# Allegro board ASR6601CB_PA_LNA_MD_V11_240312.brd
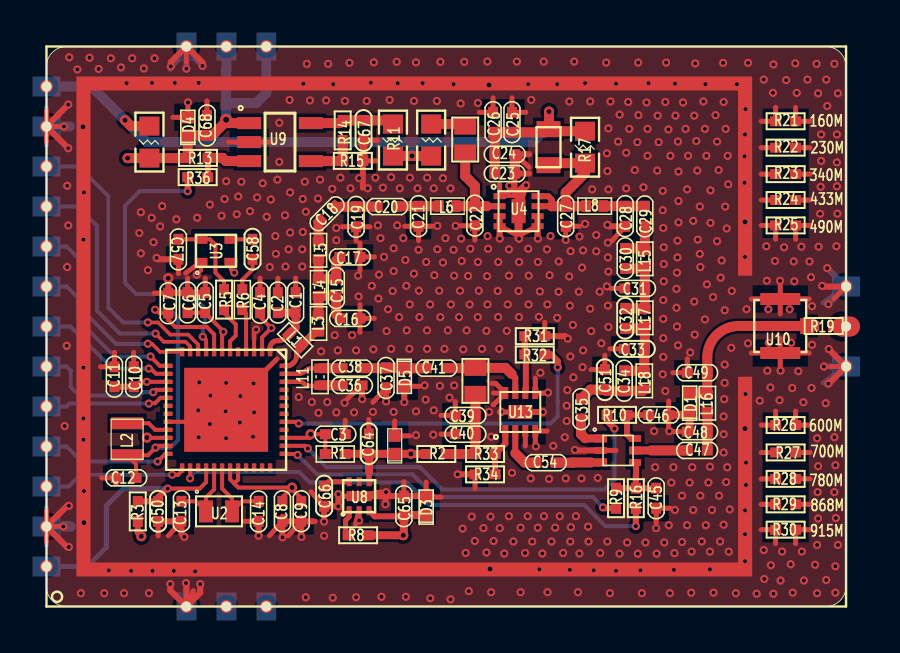
[diagram p0: board, top side]
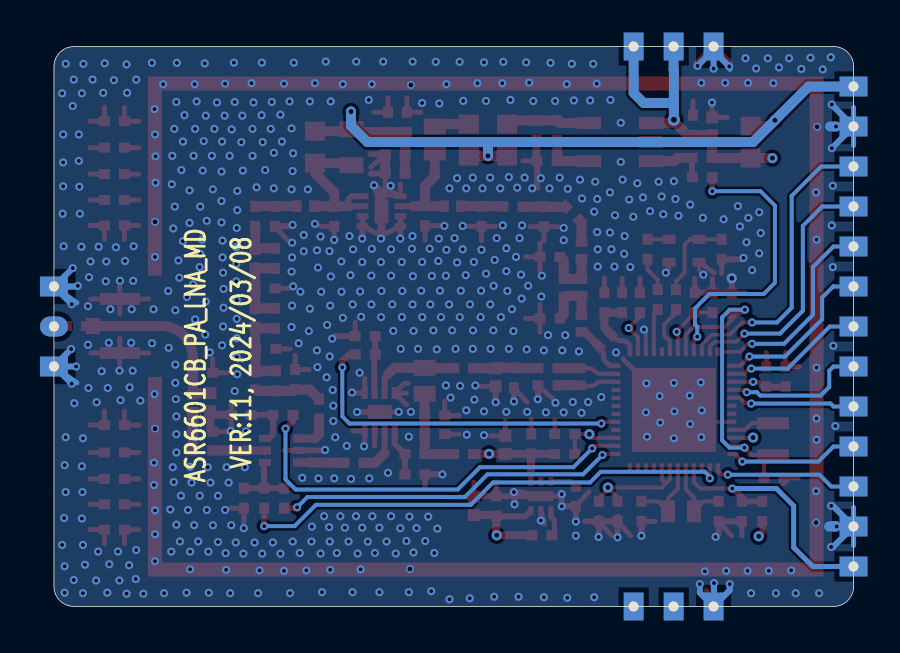
[diagram p1: board, bottom side, seen from below]

Outline 40.01 x 27.99 mm; copper layers: TOP, GND, VCC, BOTTOM. Coordinates in mm from the lower left corner of the outline.
Outline path: 0,26.99 0,1 arc(0.29,0.29) 1,0 39.01,0 arc(39.71,0.29) 40.01,1 40.01,26.99 arc(39.71,27.7) 39.01,27.99 1,27.99 arc(0.29,27.7) 0,26.99

## Placement (name value [footprint] x y rotation side)
C1  47nF  [C0402]  12.47 15.19 270 top
C2  82pF  [C0402]  11.58 15.19 270 top
C3  0.1uF  [C0402]  14.45 8.61 180 top
C4  0.1uF  [C0402]  10.69 15.19 90 top
C5  2.2uF  [C0402]  7.95 15.19 270 top
C6  0.1uF  [C0402]  7.06 15.19 270 top
C7  0.1uF  [C0402]  6.1 15.16 90 top
C8  2.2uF  [C0402]  11.81 4.75 270 top
C9  0.01uF  [C0402]  12.75 4.75 270 top
C10  0.1uF  [C0402]  4.37 11.48 270 top
C11  0.1uF  [C0402]  3.4 11.48 270 top
C12  0.47uF  [C0402]  3.99 6.43 180 top
C13  NC(10pF)  [C0402]  6.76 4.75 270 top
C14  NC(10pF)  [C0402]  10.62 4.75 90 top
C15  3.3pF  [C0402]  14.5 15.93 90 top
C16  6.0pF  [C0402]  15.19 14.4 180 top
C17  12pF  [C0402]  15.19 17.48 0 top
C18  100pF  [C0402]  14.05 19.63 45 top
C19  6.0pF  [C0402]  15.49 19.48 90 top
C20  1nF  [C0402]  17.04 19.99 180 top
C21  20pF  [C0402]  18.62 19.51 270 top
C22  NC  [C0402]  21.44 19.53 270 top
C23  1uF  [C0402]  22.94 21.64 0 top
C24  1nF  [C0402]  22.94 22.61 0 top
C25  0.1uF  [C0402]  23.29 24.21 270 top
C26  1nF  [C0402]  22.35 24.21 270 top
C27  2.4pF  [C0402]  25.98 19.51 270 top
C28  12pF  [C0402]  28.96 19.51 270 top
C29  330pF  [C0402]  29.94 19.51 90 top
C30  3.3pF  [C0402]  28.96 17.4 270 top
C31  12pF  [C0402]  29.44 15.9 180 top
C32  1pF  [C0402]  28.96 14.4 270 top
C33  12pF  [C0402]  29.41 12.88 180 top
C34  1pF  [C0402]  28.91 11.28 270 top
C35  1nF  [C0402]  26.75 9.87 90 top
C36  3.9pF  [C0402]  15.29 11.05 0 top
C37  1pF  [C0402]  16.99 11.43 90 top
C38  4.7pF  [C0402]  15.29 11.91 0 top
C39  0.1uF  [C0402]  20.95 9.55 180 top
C40  10nF  [C0402]  20.95 8.61 180 top
C41  10nF  [C0402]  19.51 11.91 180 top
C45  100pF  [C0402]  30.51 5.41 90 top
C46  100pF  [C0402]  30.63 9.58 0 top
C47  100pF  [C0402]  32.56 7.8 0 top
C48  NC  [C0402]  32.56 8.74 0 top
C49  NC  [C0402]  32.56 11.68 0 top
C50  10nF  [C0402]  5.59 4.75 270 top
C51  4.7pF  [C0402]  27.94 11.34 90 top
C54  1nF  [C0402]  24.99 7.19 0 top
C57  0.1uF  [C0402]  6.6 17.85 90 top
C58  10pF  [C0402]  10.31 17.85 270 top
C64  2.2uF  [C0402]  16.13 8.13 270 top
C65  2.2uF  [C0402]  17.88 5.02 90 top
C66  0.01uF  [C0402]  13.89 5.51 270 top
C67  2.2uF  [C0402]  15.87 23.8 90 top
C68  2.2uF  [C0402]  8.04 24.05 90 top
D1  RCLAMP0531T  [ESD1006_2N_MM]  32.18 10.21 90 top
D3  PTVS5V5D1BL  [ESD1006_2N_MM]  19 5.02 90 top
D4  PTVS5V5D1BL  [ESD1006_2N_MM]  7.08 24 90 top
D5  1PS79SB17  [ESD1006_2N_MM]  17.91 11.46 270 top
D6  PTVSUC3D3V3B  [ESD1006_2N_MM]  17.42 8.08 90 top
J3  HDR  [ASR6601MDPA_2800X3600_22N_MM]  13 14 90 top
L1  56nH  [L0402]  12.45 13.31 135 top
L2  15uH  [L2016]  4.04 8.36 270 top
L3  1.8nH  [L0402]  13.61 14.15 90 top
L4  7.5nH  [L0402]  13.61 15.95 90 top
L5  18nH  [L0402]  13.61 17.81 90 top
L6  4.7nH  [L0402]  20.07 20.02 0 top
L7  100nH/0805  [L2012]  25.12 22.96 90 top
L8  5.6nH  [L0402]  27.43 20.02 0 top
L11  33nH  [L0402]  13.69 11.48 90 top
L12  390nH/0603  [L0603]  21.46 11.28 90 top
L14  100nH/0603  [L0603]  20.95 23.34 90 top
L15  8.2nH  [L0402]  29.94 17.38 270 top
L16  0R  [L0402]  33.07 10.16 270 top
L17  6.2nH  [L0402]  29.94 14.43 270 top
L18  18nH  [L0402]  29.91 11.28 270 top
NOREF  -  []  -68.73 -66.24 0 top
NOREF#2  -  []  -65.56 -63.06 0 top
NOREF#3  -  []  -65.56 -63.06 0 top
NOREF#4  -  []  -68.73 -66.24 0 top
NOREF#5  -  []  -230.68 -277.82 0 top
R1  0R  [R0402]  14.45 7.62 180 top
R2  0R  [R0402]  19.51 7.62 0 top
R3  1K  [R0402]  4.57 4.75 270 top
R5  0R  [R0402]  8.89 15.34 270 top
R6  10R  [R0402]  9.8 15.34 270 top
R7  240R/0603  [R0603]  19.25 23.32 270 top
R8  10k  [R0402]  15.6 3.56 180 top
R9  100R  [R0402]  28.5 5.41 90 top
R10  100R  [R0402]  28.55 9.58 180 top
R11  0R  [R0603]  17.34 23.32 90 top
R13  NC(10K)  [R0402]  7.59 22.43 0 top
R14  NC(100K)  [R0402]  14.82 23.8 90 top
R15  NC(47K)  [R0402]  15.33 22.28 180 top
R16  NC(100R)  [R0402]  29.49 5.41 90 top
R17  300R/0603  [R0603]  26.95 22.96 90 top
R19  0R  [R0402]  38.89 14.02 0 top
R21  NC(0R)  [R0402]  36.98 24.26 0 top
R22  NC(0R)  [R0402]  36.98 22.94 0 top
R23  NC(0R)  [R0402]  36.98 21.62 0 top
R24  NC(0R)  [R0402]  36.98 20.32 0 top
R25  NC(0R)  [R0402]  36.98 19.05 0 top
R26  NC(0R)  [R0402]  36.98 9.07 0 top
R27  NC(0R)  [R0402]  36.98 7.7 0 top
R28  NC(0R)  [R0402]  36.98 6.38 0 top
R29  NC(0R)  [R0402]  36.98 5.11 0 top
R30  NC(0R)  [R0402]  36.98 3.84 0 top
R31  100R  [R0402]  24.43 13.51 180 top
R32  100R  [R0402]  24.43 12.6 180 top
R33  NC(5.1K)  [R0402]  21.95 7.62 0 top
R34  0R  [R0402]  21.95 6.6 0 top
R35  NC(0R)  [R0603]  5.16 23.22 90 top
R36  1K  [R0402]  7.57 21.46 0 top
U1  ASR6601QFN48  [ASR6501_QFN40P_600X600_48N_MM]  8.99 9.83 90 top
U2  XO_32.768K  [XTAL_SMD160X100_2N_MM]  8.64 4.75 0 top
U3  TCXO  [OSC_SMD200X160_4N_MM]  8.48 17.78 0 top
U4  ZD1118  [DFN50P_200X200_8N_MM]  23.62 19.76 0 top
U7  PE4259/ZD5402  [SC50P_150X150_6N_MM]  28.6 7.8 90 top
U8  SGM2035C-3.3  [LDO_DFN50P_160X160_6N_MM]  15.65 5.51 90 top
U9  XC6227C381MR-G(SGM2035C-3.3)  [SOT95P_165X290_5N_MM]  11.7 23.22 0 top
U10  -  [IPEX]  36.71 14.02 0 top
U13  ZD9037  [DFN50P_200X200_8N_MM]  23.71 9.72 90 top

## Library data of the parts
C1-C41 C45-C49 C51 C54 C57 C58 C64-C68 = RCL_CAP_NP
C50 = CAP
D1 D3-D6 = TVS-BI
J3 = CN_2
L1-L6 L8 L11 L15-L18 = RCL_IND
L7 L12 L14 = INDUCTOR/SM
R1 R2 R5-R11 R13-R17 R21-R36 = RCL_RES
R3 R19 = RES
U1 = ASR6505_9
U2 = XO
U3 = TCXO_0
U4 = ZD1037_1
U7 = MXD8625C_1
U8 = IC-LDO-SGM2035C_0
U9 = IC-LDO-SGM2035C_3
U10 = IPEX
U13 = ZD1037_0

## Footprints (pads in the part's own frame, mm; a bottom-side part is the same pattern mirrored in y, then rotated)
ASR6501_QFN40P_600X600_48N_MM
  rect 0.45x0.22 smd: 1(2.9,-2.2) 2(2.9,-1.8) 3(2.9,-1.4) 4(2.9,-1) 5(2.9,-0.6) 6(2.9,-0.2) 7(2.9,0.2) 8(2.9,0.6) 9(2.9,1) 10(2.9,1.4) 11(2.9,1.8) 12(2.9,2.2) 25(-2.9,2.2) 26(-2.9,1.8) 27(-2.9,1.4) 28(-2.9,1) 29(-2.9,0.6) 30(-2.9,0.2) 31(-2.9,-0.2) 32(-2.9,-0.6) 33(-2.9,-1) 34(-2.9,-1.4) 35(-2.9,-1.8) 36(-2.9,-2.2)
  rect 0.22x0.45 smd: 13(2.2,2.9) 14(1.8,2.9) 15(1.4,2.9) 16(1,2.9) 17(0.6,2.9) 18(0.2,2.9) 19(-0.2,2.9) 20(-0.6,2.9) 21(-1,2.9) 22(-1.4,2.9) 23(-1.8,2.9) 24(-2.2,2.9) 37(-2.2,-2.9) 38(-1.8,-2.9) 39(-1.4,-2.9) 40(-1,-2.9) 41(-0.6,-2.9) 42(-0.2,-2.9) 43(0.2,-2.9) 44(0.6,-2.9) 45(1,-2.9) 46(1.4,-2.9) 47(1.8,-2.9) 48(2.2,-2.9)
  rect 4.2x4.2 smd: 49(0,0)
ASR6601MDPA_2800X3600_22N_MM
  round 0.65 hole 0.5: 1(-12,13) 2(-10,13) 3(-8,13) 4(-6,13) 5(-4,13) 6(-2,13) 7(0,13) 8(2,13) 9(4,13) 10(6,13) 11(8,13) 12(10,13) 13(12,13) 14(14,6) 15(14,4) 16(14,2) 17(2,-27) 19(-2,-27) 20(-14,2) 21(-14,4) 22(-14,6)
  oval 1x1.4 hole 0.5: 18(0,-27)
C0402
  rect 0.55x0.5 smd: 1(-0.5,0) 2(0.5,0)
DFN50P_200X200_8N_MM
  rect 0.6x0.3 smd: 1(-0.95,0.75) 2(-0.95,0.25) 3(-0.95,-0.25) 4(-0.95,-0.75) 5(0.95,-0.75) 6(0.95,-0.25) 7(0.95,0.25) 8(0.95,0.75)
  rect 0.7x1.2 smd: 9(0,0)
ESD1006_2N_MM
  rect 0.6x0.6 smd: 1(-0.45,0) 2(0.45,0)
IPEX
  rect 2x0.6 smd: 1(0,1.35) 2(0,-1.35)
  rect 0.7x0.8 smd: 3(1.35,0)
L0402
  rect 0.47x0.58 smd: 1(-0.425,0) 2(0.425,0)
L0603
  rect 0.8x1.1 smd: 1(-0.65,0) 2(0.65,0)
L2012
  rect 0.8x1.2 smd: 1(-0.9,0) 2(0.9,0)
L2016
  rect 0.6x1.6 smd: 1(-0.8,0) 2(0.8,0)
LDO_DFN50P_160X160_6N_MM
  rect 0.45x0.25 smd: 1(-0.725,0.5) 2(-0.725,0) 3(-0.725,-0.5) 4(0.725,-0.5) 5(0.725,0) 6(0.725,0.5)
  rect 0.5x1.25 smd: 7(0,0)
OSC_SMD200X160_4N_MM
  rect 0.65x0.45 smd: 1(-0.75,-0.575) 2(0.75,-0.575) 3(0.75,0.575) 4(-0.75,0.575)
R0402
  rect 0.55x0.5 smd: 1(-0.5,0) 2(0.5,0)
R0603
  rect 0.95x1 smd: 1(-0.8,0) 2(0.8,0)
SC50P_150X150_6N_MM
  rect 0.4x0.6 smd: 1(0.6,0.85) 3(-0.6,0.85) 5(0,-0.85)
  rect 0.35x0.6 smd: 2(0,0.85) 4(-0.6,-0.85) 6(0.6,-0.85)
SOT95P_165X290_5N_MM
  rect 1.2x0.6 smd: 1(-1.554,0.95) 2(-1.554,0) 3(-1.554,-0.95) 4(1.529,-0.95) 5(1.529,0.95)
XTAL_SMD160X100_2N_MM
  rect 0.7x1.1 smd: 1(-0.65,0) 2(0.65,0)

## Nets
GND: C1.1 C2.1 C3.1 C4.2 C5.1 C6.1 C7.2 C8.2 C9.2 C10.1 C11.1 C12.2 C13.2 C14.1 C16.1 C17.2 C19.1 C21.2 C22.2 C23.2 C24.2 C25.1 C26.1 C27.2 C28.2 C31.2 C33.2 C36.2 C37.1 C39.2 C40.2 C45.1 C46.2 C48.1 C49.1 C50.2 C51.2 C57.1 C64.1 C65.2 C66.2 C67.1 C68.2 D1.1 D3.2 D4.2 D5.2 D6.2 J3.2 J3.12 J3.14 J3.17 J3.19 J3.22 R15.1 R21.1 R21.2 R22.1 R22.2 R23.1 R23.2 R24.1 R24.2 R25.1 R25.2 R26.1 R26.2 R27.1 R27.2 R28.1 R28.2 R29.1 R29.2 R30.1 R30.2 R31.1 R34.1 U1.3(GND_PLL) U1.20(GND_DCC) U1.49(GND) U3.1(GND#1) U3.2(GND#2) U4.1(NC1) U4.3(NC2) U4.4(NC3) U4.5(NC4) U4.6(NC5) U4.9(EPAD) U7.2(GND) U8.2(GND) U8.7(EGND) U9.2(GND) U10.1 U10.2 U13.3(NC2) U13.4(NC3) U13.5(NC4) U13.8(NC6) U13.9(EPAD)
VBAT_IN: C65.1 C68.1 D3.1 D4.1 J3.15 J3.16 R8.1 R13.1 R35.1 U8.3(IN) U9.1(IN)
VCC_3V3: C3.2 C4.1 C5.2 C6.2 C8.1 C9.1 C10.2 C11.2 R1.2 R3.2 U1.2(VDD_IN) U1.7(VBAT_RF) U1.15(VBAT_ESD0) U1.22(VBAT_DCC) U1.31(VBAT_RTC) U1.32(VBAT_ANA) U1.39(VBAT_ESD3)
VDD_LNA: C39.1 C40.1 L12.1 R2.2 R33.1
VDD_PA: C23.1 C24.1 C25.2 C26.2 J3.13 L7.2 R7.2 R11.1 R17.2 R35.2
VDD_PA_ADJ: C67.2 R11.2 R14.2 U9.5(OUT)
ANT_SW_L1: R16.1 U1.26(GPIO59/LORAC_RF_SW)
GPIO00_L1: J3.11 U1.10(GPIO00/SPI_CLK)
GPIO01_L1: R36.1 U1.9(GPIO01/SPI_SEL)
GPIO02_L1: J3.9 U1.12(GPIO02/SPI_MISO)
GPIO03_L1: J3.10 U1.11(GPIO03/SPI_MOSI)
GPIO04_L1: U1.36(GPIO04/UART1_TX)
GPIO05_L1: U1.35(GPIO05/UART1_RX)
GPIO06_L1: J3.8 U1.13(GPIO06/SWD_DAT)
GPIO07_L1: J3.7 U1.14(GPIO07/SWD_CLK)
GPIO08_L1: U1.34(GPIO08/ADC_IN1)
GPIO09_L1: R9.1 U1.37(GPIO09/DAC_OUT)
GPIO10_L1: U1.42(GPIO10/OPA0_OUT)
GPIO11_L1: U1.33(GPIO11/ADC_IN0)
GPIO14_L1: U1.18(GPIO14/I2C_CLK)
GPIO15_L1: U1.19(GPIO15/I2C_DAT)
GPIO16_L1: J3.6 U1.16(GPIO16/UART0_RX)
GPIO17_L1: J3.5 U1.17(GPIO17/UART0_TX)
GPIO32_L1: U1.45(GPIO32/COMP1_OUT)
GPIO33_L1: U1.44(GPIO33/COMP1_INN)
GPIO37_L1: U1.43(GPIO37/COMP1_INP)
GPIO44_L1: R32.1 U1.41(GPIO44/OPA0_INN)
GPIO45_L1: U1.40(GPIO45/OPA0_INP)
GPIO47_L1: R10.2 U1.38(GPIO47/LPUART_TX)
GPIO58_L1: U1.27(GPIO58/LP_TIMER)
GPIO60_L1: J3.3 U1.25(GPIO60/LPUART_RX)
GPIO62_L1: J3.4 U1.24(GPIO62/WKUP)
LDO_3V3: C64.2 D6.1 J3.20 J3.21 R1.1 R2.1 U8.4(OUT)
PWR_TCXO_L1: R5.2 U1.6(PWR_TCXO)
RF_TR: C49.2 D1.2 L16.1 R19.1 U10.3
RFI_N_L1: C38.1 L11.2 U1.47(RFI_N)
RFI_P_L1: C36.1 L11.1 U1.46(RFI_P)
RFO_L1: L1.1 L3.1 U1.48(RFO)
RSTN_L1: C50.1 J3.1 R3.1 U1.28(RSTN)
VR_PA_L1: C1.2 C2.2 L1.2 U1.1(VR_PA)
VREG_L1: C7.1 C12.1 L2.2 U1.8(VDCC_RF) U1.23(VREG)
XO32K_IN_L1: C13.1 U1.29(XO32K_IN) U2.1(XTA)
XO32K_OUT_L1: C14.2 U1.30(XO32K_OUT) U2.2(XTB)
XTA_L1: R6.2 U1.4(XTA)
XTB_L1: U1.5(XTB)
N16777695: L2.1 U1.21(DCC_SW)
N16783930: C37.2 C38.2 C41.2 D5.1
N16784957: C41.1 L12.2 U13.7(RFOUT)
N16787701: C57.2 R5.1 U3.4(VCC)
N17165846: R13.2 R36.2 U9.3(EN)
N17167587: R14.1 R15.2 U9.4(FB)
N17184405: L14.2 R7.1
N17184423: C27.1 L7.1 L8.1 R17.1 U4.7(RFOUT) U4.8(NC6)
N17184595: C22.1 L6.2 L14.1 U4.2(RFIN)
N17196037: C45.2 R9.2 R16.2 U7.4(VC2)
N17196046: C46.1 R10.1 U7.6(VC1)
N17196048: C47.1 U7.5(RFC)
N17196103: C47.2 C48.2 L16.2
N17196171: C54.1 U13.2(RFIN)
N17198849: C30.2 C31.1 C32.1 L15.2 L17.1
N17206614: C35.1 U7.1(RF1)
N17221635: C66.1 U8.6(BP)
N17221684: R8.2 U8.1(EN)
N17240361: C28.1 C29.2 L8.2
N17246084: C32.2 C33.1 C34.1 L17.2 L18.1
N17247102: C54.2 U7.3(RF2)
N17255377: C34.2 C35.2 C51.1 L18.2
N17256212: C29.1 C30.1 L15.1
N17258664: C18.2 C19.2 C20.2
N17258678: C15.1 C16.2 L3.2 L4.1
N17258699: C15.2 C17.1 L4.2 L5.1
N17258757: C18.1 L5.2
N17259603: C20.1 C21.1 L6.1
N17299920: R33.2 R34.2 U13.1(NC1)
N17300837: R31.2 R32.2 U13.6(SHDN)
N17308759: C58.2 R6.1
N17309286: C58.1 U3.3(VOUT)
N17313163: J3.18 R19.2

Pads without a net: U8 5

## Via types
v1: diameter 0.406, hole 0.203, TOP to BOTTOM, 647 vias
v2: diameter 0.508, hole 0.254, TOP to BOTTOM, 11 vias
v3: diameter 0.61, hole 0.305, TOP to BOTTOM, 1 via
v4: diameter 0.4, hole 0.25, TOP to BOTTOM, 6 vias

## Routing (per net, layer and track width the routed paths; a pad name or vN(x,y) marks a point on that pad's centre or on a via; arc(x,y) is an arc through that point)
GND: length 224.8
  TOP w0.2: v1(10.49,13.84) 10.39,13.74 U1.3 ; U3.1 7.73,16.8 v1(7.52,16.59) ; U1.20 8.39,9.23 U1.49 ; 23.62,20.66 23.51,20.66 23.37,20.52 23.01,20.52 22.99,20.51 U4.1 22.67,20.77 ; v1(9.4,16.69) 9.23,16.85 U3.2
  TOP w0.25: 15.07,10.39 C36.2 ; R31.1 24.93,14.21 ; C1.1 12.47,16.41 ; 37.48,18.36 R25.2 38.2,19.05 ; R24.2 38.2,20.32 ; C16.1 15.69,15.1 ; C16.1 15.69,13.71 ; C16.1 16.41,14.4 ; 25.98,18.29 C27.2 26.67,19.01 ; 23.29,25.43 C25.1 23.99,24.71 ; 23.44,20.95 C23.2 ; U7.2 28.5,7.8 ; C65.2 17.88,6.24 ; 35.76,24.26 R21.1 36.48,24.95 ; 35.76,22.94 R22.1 ; 38.2,24.26 R21.2 37.48,24.95 ; J3.2 0,4.77 ; J3.2 0,3.23 ; J3.2 0.77,4 ; 28.3,18.29 C28.2 ; 24.46,8.02 U13.4 25.05,8.77 ; U4.9 23.93,20.81 ; 28.19,12.88 C33.2 ; 12.1,3.53 C9.2 ; 5.4,15.66 C7.2 ; 23.62,20.63 23.62,20.81 ; R15.1 16.55,22.28 ; 13.45,4.25 13.32,4.25 ; C5.1 7.95,16.41 ; U10.2 36.71,13.42 ; U10.2 36.71,11.93 ; U10.2 35.27,12.67 ; U10.2 38.16,12.67 ; J3.22 7.35,0.78 ; 35.76,6.38 R28.1 ; 23.83,18.64 U4.5 ; 11.16,3.53 C8.2 ; R27.2 38.2,7.7 ; 22.66,9.72 U13.9 ; 2.77,6.43 C12.2 ; 24.46,11.41 U13.5 25.05,10.67 ; 19.74,5.47 D3.2 19,6.21 ; 32.06,12.38 C49.1 31.34,11.68 ; 15.69,16.78 C17.2 ; C17.2 15.69,18.17 ; C17.2 16.41,17.48 ; 9.92,4.25 C14.1 ; 7,27.23 J3.14 ; C19.1 16.19,18.98 ; C19.1 15.49,18.26 ; C19.1 14.8,18.98 ; U10.1 36.71,16.12 ; U10.1 35.27,15.37 ; U10.1 38.16,15.37 ; U10.1 36.71,14.63 ; 22.3,11.15 22.48,11.15 U13.8 ; 31.13,8.88 C46.2 31.13,10.27 ; 17.42,9.27 D6.2 18.17,8.53 ; 35.76,21.62 R23.1 ; C6.1 7.06,16.41 ; 22.67,21.11 22.67,20.77 ; 19.74,9.55 C39.2 20.45,10.25 ; 38.2,3.84 R30.2 37.48,3.14 ; 17.92,19.01 C21.2 ; C21.2 19.31,19.01 ; C21.2 18.62,18.29 ; 21.44,18.31 C22.2 20.74,19.03 ; 2.71,11.98 C11.1 3.4,12.7 ; U1.49 11.54,12.37 ; v1(16.99,10.25) 16.99,10.21 ; 9.1,23.22 U9.2 11.19,23.22 ; 37.48,9.76 R26.2 38.2,9.07 ; C10.1 4.37,12.7 ; 36.48,9.76 R26.1 35.76,9.07 ; 15.46,4.12 U8.2 v1(15.65,4.29) ; J3.12 0,24.77 ; J3.12 0.77,24 ; J3.12 0,23.23 ; 35.76,7.7 R27.1 ; R29.2 38.2,5.11 ; R23.2 38.2,21.62 ; 21.65,24.71 C26.1 22.35,25.43 ; 23.96,8.02 U13.3 ; C64.1 16.13,9.35 ; 27.94,12.56 C51.2 27.25,11.84 ; 35.76,3.84 R30.1 36.48,3.14 ; 6.96,16.67 U3.1 ; 31.34,8.74 C48.1 ; v1(14.6,5.61) 14.71,5.51 U8.7 16.72,5.73 ; 5.59,3.53 C50.2 ; 16.34,10.21 C37.1 ; C68.2 8.04,25.27 ; U13.8 22.37,10.08 22.35,10.08 ; U13.8 22.36,10.67 ; D5.2 18.65,11.01 ; 36.48,18.36 R25.1 35.76,19.05 ; 35.76,5.11 R29.1 ; U4.4 23.42,18.64 ; 21.45,5.91 R34.1 ; 30.51,4.19 C45.1 31.2,4.91 ; C67.1 16.56,23.3 ; C2.1 11.58,16.41 ; C24.2 24.16,21.95 ; 6.6,16.63 C57.1 ; 6.1,3.53 C13.2 ; 7.08,25.2 D4.2 6.33,24.45 ; 35.76,20.32 R24.1 ; 28.22,15.9 C31.2 ; C4.2 10.69,16.41 ; 39.4,15.39 J3.17 ; R22.2 38.2,22.94 ; U4.1 23.42,20.88 ; C3.1 14.95,9.31 ; R28.2 38.2,6.38 ; 13.24,5.73 C66.2 ; 39.24,12 J3.19 ; 19.74,8.61 C40.2
  TOP w0.3: J3.22 6.2,0.8 v1(6.2,1.11) ; J3.22 7.48,0.48 7.7,0.69 v1(7.7,1.11) ; J3.22 7,1.15 v1(6.99,1.17) ; 13.32,4.25 C9.2 ; C9.2 C8.2 ; C9.2 12.75,3.48 v1(12.76,3.47) ; C9.2 12.75,4.43 ; v1(24.84,9.72) U13.9 ; v1(24.59,18.39) 24.57,18.4 U4.5 U4.6 ; v1(6.91,3.48) 6.76,3.62 C13.2 6.75,4.25 C50.2 ; C8.2 11.81,4.48 ; C8.2 v1(11.81,3.45) ; v1(26.44,7.82) 26.47,7.8 U7.2 ; v1(15.8,10.36) 15.79,10.37 C36.2 ; v1(1.09,25.1) 0.61,24.61 0.61,24.6 J3.12 0.58,23.42 0.59,23.42 v1(1.09,22.91) ; D5.2 v1(17.91,10.21) 17.91,10.19 ; v1(38.81,16.03) 38.84,16 J3.17 ; v1(39.12,11.14) 39.18,11.2 39.21,11.2 J3.19 39.14,12.86 v1(39.14,12.87) ; v1(13.89,4.24) C66.2 14.59,5.01 v1(14.6,5) 14.6,5.01 v1(14.6,5.61) ; v1(20.57,6.6) R34.1 ; v2(6.1,16.41) C7.2 6.12,15.69 C6.1 C5.1 ; D3.2 18.95,5.52 C65.2 17.19,5.52 v1(16.99,5.71) 16.97,5.69 ; R31.1 25.96,13.51 v1(26.09,13.39) ; 16.97,5.69 16.79,5.51 U8.7 ; 16.97,5.69 v1(16.97,5.11) ; 15.83,20.94 R15.1 ; v1(5.51,17.42) 5.58,17.35 C57.1 ; v1(28.07,19.08) 28.14,19.01 C28.2 ; v1(6.22,27) 6.22,27.21 J3.14 7.81,27.19 v1(7.81,27.03) ; C23.2 24.16,21.64 ; v1(1.12,2.97) 1.03,2.97 J3.2 0.61,4.6 0.61,4.6 1.04,5.03 v1(1.12,5.03) ; v1(16.99,10.25) C37.1 ; v1(22.68,18.39) 22.67,18.4 U4.4 U4.3 ; v1(10.62,3.53) C14.1 ; C24.2 24.16,22.61 ; C12.2 3.49,6.17
  TOP w0.4: v1(23.65,18.39) 23.62,18.41 U4.9 23.62,20.57 ; 23.62,20.57 23.62,20.63 23.77,20.78 23.77,20.83 v1(24,21.06) ; 23.62,20.57 v1(23.16,21.03) ; R15.1 15.87,22.31 C67.1 ; C48.1 32.18,8.86 D1.1 32,9.58 C46.2
  TOP w0.5: C24.2 C23.2
  GND w0.25: J3.22 7.63,0.62 ; J3.2 0,4.79 ; J3.2 0.8,4 ; J3.2 0,3.2 ; 7,27.2 J3.14 ; 39.38,15.37 J3.17 ; 39.21,12 J3.19 ; J3.12 0.8,24 ; J3.12 0,24.79 ; J3.12 0,23.2
  GND w0.3: J3.17 38.84,16 v1(38.81,16.03) ; J3.22 7,1.15 v1(6.99,1.17)
  VCC w0.25: J3.12 0.8,24 ; J3.12 0,23.2 ; J3.12 0,24.79 ; 39.38,15.37 J3.17 ; J3.2 0.8,4 ; J3.2 0,3.2 ; J3.2 0,4.79 ; 7,27.2 J3.14 ; J3.22 7.63,0.62 ; 39.21,12 J3.19
  VCC w0.3: J3.22 7,1.15 v1(6.99,1.17) ; J3.17 38.84,16 v1(38.81,16.03)
  BOTTOM w0.25: J3.22 7,1.14 ; 0,23.05 J3.12 0,24.94 ; 38.86,11.18 J3.19 ; 0,4.94 J3.2 0,3.05 ; 6.19,26.85 J3.14 ; 38.86,15.18 J3.17
  BOTTOM w0.3: J3.2 1.04,5.03 v1(1.12,5.03) ; J3.2 v1(0.85,4) ; J3.2 1.03,2.97 v1(1.12,2.97) ; v1(39.12,11.14) 39.98,12 ; 39.98,12 J3.19 40,12.01 v1(39.14,12.87) ; 39.98,12 v1(38.9,12) ; v1(1.09,25.1) 1.09,25.08 J3.12 ; v1(38.81,16.03) 38.84,16 39.99,16 ; v1(6.99,1.17) 6.99,0.02 ; 6.99,0.02 J3.22 7.7,0.69 v1(7.7,1.11) ; 6.99,0.02 6.2,0.8 v1(6.2,1.11) ; J3.12 1.09,22.91 v1(1.09,22.91) ; J3.12 v1(0.88,24) ; v1(39.12,15.11) J3.17 39.99,16 ; 7,27.83 7,27.78 ; 7,27.83 J3.14 ; 7,27.83 v1(7.81,27.03) ; 7,27.78 v1(6.22,27) ; 7,27.78 v1(7,26.89) ; v1(39.07,16.92) 39.99,16
  BOTTOM w0.5: 1.11,4.01 0.89,4.01 0.91,4 1.23,4 ; v1(0.88,24) 1.18,24
  vias: v1(0.91,9.02) v1(1.04,21.03) v1(1.04,16.97) v1(1.02,13.03) v1(1.14,27.46) v1(1.09,19.05) v1(1.55,26.85) v1(1.73,0.66) v1(1.85,18.34) v1(1.85,11.94) v1(1.85,9.4) v1(1.85,8.33) v1(1.88,20.7) v1(1.88,5.77) v1(2.16,27.43) v1(2.62,26.87) v1(2.9,0.66) v1(3.12,1.8) v1(3.23,27.41) v1(3.73,26.95) v1(3.89,0.66) v1(4.01,26.16) v1(4.24,1.78) v1(4.29,27.41) v1(4.65,18.67) v1(4.72,19.71) v1(4.72,17.65) v1(4.88,26.9) v1(5.08,16.81) v1(5.13,0.66) v1(5.28,26.18) v1(5.26,19.43) v1(5.31,1.78) v1(5.41,27.41) v1(5.36,18.21) v1(5.69,19) v1(5.79,20.02) v1(6.43,26.18) v1(6.38,1.78) v1(6.5,19.35) v1(7.09,25.2) v1(7.44,1.75) v1(7.54,19.43) v1(7.62,26.18) v1(7.65,11.2) v1(7.59,9.8) v1(7.62,8.46) v1(8.18,20.09) v1(8.2,10.54) v1(8.18,9.12) v1(8.76,19.53) v1(8.92,20.37) v1(8.99,21.26) v1(8.99,11.18) v1(8.97,9.75) v1(8.99,8.41) v1(9.53,19.61) v1(9.6,20.5) v1(9.75,21.23) v1(9.7,10.52) v1(9.68,9.19) v1(10.19,19.76) v1(10.34,8.48) v1(10.36,11.15) v1(10.39,9.7) v1(10.54,20.45) v1(10.82,21.16) v1(11.02,19.48) v1(11.23,20.35) v1(11.18,16.97) v1(11.46,18.52) v1(11.48,17.63) v1(11.65,24.18) v1(11.65,22.23) v1(11.56,21.34) v1(11.94,19.56) v1(11.89,12.7) v1(11.96,16.99) v1(12.12,17.86) v1(12.17,25.32) v1(12.19,20.7) v1(12.19,18.69) v1(12.62,10.46) v1(12.85,26.14) v1(12.83,20.37) v1(12.83,18.72) v1(12.8,17.86) v1(12.8,16.99) v1(12.93,21.23) v1(13.03,27.13) v1(12.98,19.74) v1(12.98,0.46) v1(13.18,25.3) v1(13.28,10.22) v1(13.59,20.4) v1(13.61,9.68) v1(13.69,21.34) v1(13.74,12.75) v1(13.89,3.53) v1(14,25.3) v1(14.05,10.22) v1(14.1,27.13) v1(14.35,26.11) v1(14.3,20.88) v1(14.33,0.43) v1(14.43,13.56) v1(14.5,18.92) v1(14.5,18.31) v1(14.5,9.7) v1(14.58,12.8) v1(14.71,21.44) v1(14.94,25.27) v1(14.92,10.18) v1(15.16,27.18) v1(15.21,20.9) v1(15.29,13.56) v1(15.39,9.7) v1(15.49,12.8) v1(15.49,0.46) v1(15.65,21.41) v1(15.6,16.54) v1(15.62,15.49) v1(16.03,25.27) v1(16.08,20.9) v1(16.23,26.19) v1(16.28,16.03) v1(16.33,9.73) v1(16.38,27.2) v1(16.36,12.85) v1(16.46,21.44) v1(16.59,19.05) v1(16.64,16.59) v1(16.61,15.39) v1(16.71,18.41) v1(16.83,20.94) v1(16.76,0.48) v1(16.89,17.48) v1(17.02,13.77) v1(17.09,14.86) v1(17.17,25.32) v1(17.25,21.46) v1(17.25,12.88) v1(17.32,15.77) v1(17.37,17.91) v1(17.37,16.76) v1(17.37,9.73) v1(17.53,27.23) v1(17.55,19.05) v1(17.58,26.16) v1(17.65,14.46) v1(17.68,20.9) v1(17.86,18.41) v1(17.96,17.32) v1(18.01,16.03) v1(18.03,13.8) v1(17.98,0.48) v1(18.19,21.44) v1(18.18,15.1) v1(18.16,12.88) v1(18.39,25.27) v1(18.39,16.64) v1(18.49,27.2) v1(18.49,9.75) v1(18.49,8.56) v1(18.57,20.9) v1(18.62,17.83) v1(18.64,15.79) v1(18.66,14.46) v1(18.82,26.16) v1(18.92,11.05) v1(19.05,21.44) v1(19,17.22) v1(19.04,13.8) v1(19.05,12.88) v1(18.97,10.34) v1(19.2,15.1) v1(19.2,0.41) v1(19.38,20.9) v1(19.41,16.56) v1(19.38,9.8) v1(19.35,8.59) v1(19.53,25.27) v1(19.56,19.02) v1(19.56,17.86) v1(19.65,15.79) v1(19.71,27.23) v1(19.7,14.46) v1(19.68,11.02) v1(19.84,21.41) v1(19.84,17.2) v1(19.91,12.88) v1(19.96,18.41) v1(20.08,13.8) v1(20.22,20.9) v1(20.24,15.1) v1(20.17,10.44) v1(20.22,0.36) v1(20.37,26.11) v1(20.37,17.83) v1(20.4,16.54) v1(20.4,11.05) v1(20.47,19.02) v1(20.64,14.46) v1(20.73,25.15) v1(20.75,18.39) v1(20.69,15.79) v1(20.78,17.27) v1(20.85,12.85) v1(20.82,3.89) v1(20.9,27.23) v1(21.02,13.8) v1(20.98,2.67) v1(21.1,16.52) v1(21.13,0.76) v1(21.21,17.88) v1(21.18,15.1) v1(21.28,4.49) v1(21.43,3.27) v1(21.59,25.17) v1(21.59,17.22) v1(21.63,15.79) v1(21.58,14.46) v1(21.79,12.88) v1(21.86,3.92) v1(22.05,16.51) v1(22.01,13.78) v1(22.02,2.7) v1(22.06,27.24) v1(22.07,18.52) v1(22.1,17.88) v1(22.07,15.1) v1(22.15,9.73) v1(22.25,8.48) v1(22.22,4.49) v1(22.25,0.71) v1(22.37,3.27) v1(22.61,17.22) v1(22.58,15.77) v1(22.6,14.46) v1(22.66,12.88) v1(22.68,3.91) v1(22.76,9.73) v1(22.91,2.65) v1(23.03,13.78) v1(23.14,17.86) v1(23.14,16.54) v1(23.08,15.1) v1(23.14,4.51) v1(23.29,6.68) v1(23.36,3.24) v1(23.54,27.24) v1(23.65,17.22) v1(23.62,15.77) v1(23.64,14.46) v1(23.72,3.94) v1(23.72,0.71) v1(23.95,2.67) v1(24.1,26.11) v1(24.1,17.88) v1(24.13,16.54) v1(24.12,15.1) v1(24.08,4.51) v1(24.23,6.4) v1(24.26,25.32) v1(24.3,3.24) v1(24.49,8) v1(24.59,17.22) v1(24.64,14.48) v1(24.59,3.94) v1(24.69,15.75) v1(24.71,11.68) v1(24.66,1.85) v1(24.81,2.65) v1(24.88,27.24) v1(24.89,4.51) v1(25.04,17.86) v1(25.06,15.1) v1(25.1,10.69) v1(25.15,6.38) v1(25.07,0.71) v1(25.22,18.52) v1(25.17,16.56) v1(25.27,3.24) v1(25.36,8.03) v1(25.45,3.94) v1(25.55,26.11) v1(25.55,14.43) v1(25.63,17.25) v1(25.62,15.73) v1(25.68,4.51) v1(25.85,2.67) v1(25.93,8.46) v1(25.98,18.33) v1(26.03,10.03) v1(26.03,9.27) v1(25.98,6.4) v1(26.15,16.5) v1(26.06,10.82) v1(26.16,25.25) v1(26.22,17.76) v1(26.19,15.04) v1(26.21,12.5) v1(26.24,3.96) v1(26.21,3.24) v1(26.19,1.83) v1(26.34,14.07) v1(26.41,27.24) v1(26.37,11.46) v1(26.49,4.51) v1(26.64,15.73) v1(26.59,0.71) v1(26.67,18.49) v1(26.67,2.65) v1(26.85,17.81) v1(26.8,16.94) v1(26.85,12.8) v1(26.82,11.96) v1(26.77,6.4) v1(26.95,26.16) v1(26.95,19.13) v1(27.1,3.99) v1(27.12,3.24) v1(27.2,25.25) v1(27.2,14.88) v1(27.25,13.77) v1(27.3,20.85) v1(27.38,1.8) v1(27.51,18.57) v1(27.51,17.75) v1(27.58,6.43) v1(27.68,15.73) v1(27.71,2.67) v1(27.76,13.16) v1(28.01,27.19) v1(28.04,22.66) v1(28.04,16) v1(28.12,23.9) v1(28.07,21.77) v1(28.12,20.85) v1(28.09,18.19) v1(28.09,17.45) v1(28.12,16.74) v1(28.09,15.04) v1(28.12,13.97) v1(28.06,3.24) v1(28.22,25.25) v1(28.19,0.66) v1(28.5,26.14) v1(28.5,1.78) v1(28.6,23.24) v1(28.68,24.59) v1(28.67,2.64) v1(29.01,22.68) v1(29.01,20.9) v1(29.11,25.22) v1(29.06,3.2) v1(29.16,23.88) v1(29.44,21.82) v1(29.61,27.19) v1(29.62,24.56) v1(29.57,23.22) v1(29.59,2.64) v1(29.72,1.8) v1(29.79,0.66) v1(29.87,20.95) v1(30.02,25.2) v1(29.97,3.2) v1(30.12,26.16) v1(30.07,23.88) v1(30.07,22.53) v1(30.4,8.76) v1(30.45,6.96) v1(30.51,3.91) v1(30.53,2.64) v1(30.58,24.54) v1(30.63,23.22) v1(30.56,21.79) v1(30.84,20.78) v1(30.84,19.81) v1(30.84,11.61) v1(30.86,18.92) v1(30.89,17.96) v1(30.89,17.12) v1(30.89,16.26) v1(30.86,15.32) v1(30.86,14.38) v1(30.86,13.41) v1(30.86,12.47) v1(30.91,3.2) v1(31,27.19) v1(30.96,25.22) v1(30.96,10.77) v1(31.11,23.85) v1(31.14,4.06) v1(31.22,22.53) v1(31.17,8.76) v1(31.19,0.66) v1(31.27,6.19) v1(31.45,26.14) v1(31.37,6.96) v1(31.44,4.82) v1(31.42,2.66) v1(31.39,1.83) v1(31.47,24.54) v1(31.55,16.69) v1(31.52,15.88) v1(31.52,14.94) v1(31.55,14) v1(31.6,23.24) v1(31.62,21.74) v1(31.62,20.27) v1(31.62,19.2) v1(31.57,18.29) v1(31.57,17.45) v1(31.6,13.06) v1(31.85,25.2) v1(31.8,5.53) v1(31.8,3.22) v1(31.98,23.88) v1(32.05,20.85) v1(32.05,4.06) v1(32.11,22.53) v1(32.21,12.7) v1(32.18,6.19) v1(32.31,6.96) v1(32.28,2.74) v1(32.26,0.69) v1(32.41,24.54) v1(32.36,19.28) v1(32.41,15.24) v1(32.44,13.59) v1(32.36,4.82) v1(32.46,27.15) v1(32.51,23.27) v1(32.56,21.79) v1(32.59,18.34) v1(32.69,19.99) v1(32.69,17.63) v1(32.72,16.97) v1(32.71,5.53) v1(32.79,3.25) v1(32.87,25.25) v1(32.94,23.88) v1(32.94,14.35) v1(32.97,26.11) v1(33.02,22.53) v1(33.05,16.1) v1(32.99,4.06) v1(33.12,6.19) v1(33.22,20.8) v1(33.22,19.18) v1(33.2,6.99) v1(33.2,2.74) v1(33.2,1.85) v1(33.35,15.47) v1(33.3,4.82) v1(33.38,0.69) v1(33.48,24.56) v1(33.55,23.24) v1(33.55,18.26) v1(33.63,21.82) v1(33.65,5.53) v1(33.73,16.43) v1(33.7,3.25) v1(33.78,17.3) v1(33.86,27.18) v1(33.88,25.22) v1(33.93,14.81) v1(33.93,12.09) v1(33.93,11.18) v1(33.91,10.36) v1(33.88,9.5) v1(33.88,8.61) v1(33.88,7.7) v1(33.88,4.08) v1(33.99,23.88) v1(33.96,19.99) v1(34.04,18.9) v1(34.01,6.22) v1(34.09,22.53) v1(34.11,21.11) v1(34.06,6.96) v1(34.14,2.74) v1(34.19,4.85) v1(34.29,15.77) v1(34.26,12.93) v1(34.54,26.11) v1(34.49,0.66) v1(34.95,23.6) v1(34.93,22.5) v1(34.93,21.18) v1(34.95,17.48) v1(34.95,4.8) v1(34.95,3.61) v1(34.95,2.26) v1(34.98,24.87) v1(35.03,14.86) v1(34.98,10.62) v1(35,7.19) v1(35,6.07) v1(35.1,27.18) v1(35.1,13.16) v1(35.53,0.63) v1(35.69,10.29) v1(35.89,26.34) v1(35.89,2.82) v1(35.92,1.37) v1(36.02,18.01) v1(36.04,16.28) v1(36.12,14.86) v1(36.14,13.18) v1(36.07,11.79) v1(36.22,10.95) v1(36.25,2.06) v1(36.35,25.68) v1(36.37,27.1) v1(36.45,17.27) v1(36.37,0.63) v1(36.7,16.28) v1(36.73,11.79) v1(36.68,10.31) v1(36.73,1.3) v1(36.8,2.74) v1(36.91,17.96) v1(37.01,26.31) v1(37.19,14.86) v1(37.24,2.11) v1(37.26,13.18) v1(37.31,10.92) v1(37.34,0.69) v1(37.39,17.25) v1(37.41,16.26) v1(37.47,27.15) v1(37.54,25.68) v1(37.62,11.76) v1(37.77,17.98) v1(37.8,2.74) v1(37.87,10.21) v1(37.9,1.3) v1(38.07,26.34) v1(38.18,17.25) v1(38.25,16.46) v1(38.3,15.01) v1(38.3,13.08) v1(38.28,10.92) v1(38.53,27.13) v1(38.46,2.08) v1(38.61,25.65) v1(38.63,17.98) v1(38.56,8.41) v1(38.61,7.01) v1(38.58,5.71) v1(38.61,4.39) v1(38.56,3.07) v1(38.56,0.66) v1(38.74,20.98) v1(38.71,19.63) v1(38.76,23.6) v1(38.76,22.28) v1(39.01,26.34) v1(38.99,10.16) v1(39.01,1.32) v1(39.07,25.02) v1(39.42,27.13) v1(39.42,8.46) v1(39.42,5.71) v1(39.55,23.6) v1(39.55,22.2) v1(39.55,21.01) v1(39.52,18.01) v1(39.47,7.06) v1(39.5,4.42) v1(39.47,2.01) v1(39.47,0.69) v1(39.6,25.65) v1(39.57,19.63) v1(39.6,3.07) v4(1.83,23.98) v4(1.88,4.19) v4(22.15,26.07) v4(22.2,1.87) v4(34.95,19.23) v4(34.95,8.89)
VBAT_IN: length 57.5
  TOP w0.25: 16.32,4.61 U8.3
  TOP w0.3: 17.67,4.5 16.43,4.5 16.32,4.61
  TOP w0.4: C65.1 17.87,4.5 17.67,4.5 ; C65.1 17.93,4.57 D3.1 ; C65.1 17.88,3.58 v2(17.86,3.56) R8.1
  TOP w0.5: 8.99,24.24 9.07,24.17 U9.1 ; 8.99,24.24 v3(8.99,24.33) ; 8.99,24.24 8.3,23.55 8.04,23.55 ; 8.04,23.55 C68.1 ; 8.04,23.55 D4.1 7.08,22.44 R13.1 7.07,22.42 R35.1 v2(4.06,22.42)
  VCC w0.45: v2(4.06,22.42) 3.52,22.42 arc(3.28,22.37) 3.09,22.24 3.02,22.17 arc(2.89,21.98) 2.84,21.74 2.84,4 arc(2.95,3.5) 3.23,3.07 arc(3.84,2.66) 4.57,2.51 17.15,2.51 arc(17.43,2.57) 17.66,2.73 arc(17.81,2.94) 17.86,3.19 v2(17.86,3.56)
  BOTTOM w0.5: 8.99,25.17 8.99,26.83 9,26.84 J3.15 ; 8.99,25.17 v3(8.99,24.33) ; 8.99,25.17 10.5,25.17 11,25.67 J3.16
VCC_3V3: length 20.1
  TOP w0.2: v2(12.29,5.94) 11.81,5.46 C8.1 ; v2(12.29,5.94) 9.6,5.94 9.4,6.15 ; v2(12.29,5.94) 12.29,5.86 12.75,5.41 C9.1 ; 13.39,8.61 v2(13.22,8.61) ; 13.39,8.61 C3.2 R1.2 ; 13.39,8.61 13.29,8.51 13.28,8.51 13.19,8.43 U1.39 ; U1.22 5.08,8.43 5.07,8.44 v2(5.03,8.44) ; 9.4,6.15 9.59,6.34 U1.32 ; 9.4,6.15 9.19,6.35 U1.31 ; U1.15 v1(5.03,11.23) 4.74,11.23 4.67,11.15 ; C4.1 10.69,14.48 v1(11.25,13.92) 10.79,13.46 U1.2 ; U1.7 8.79,13.67 v1(8.85,13.73) 8.85,13.76 7.95,14.66 C5.2 C6.2
  TOP w0.3: C11.2 C10.2 4.5,10.98 4.67,11.15 ; R3.2 4.57,3.68 v2(4.75,3.51)
VDD_LNA: length 4.6
  TOP w0.4: 21.38,10.54 L12.1
  TOP w0.5: R2.2 R33.1 21.45,7.63 C40.1 C39.1 21.46,9.56 L12.1
VDD_PA: length 39
  TOP w0.5: C23.1 C24.1 22.44,23.62 C26.2 C25.2 24.97,23.71 L7.2 ; v2(3.94,24.31) 4.23,24.02 R35.2 ; R11.1 18.28,22.52 v2(18.29,22.53) 18.31,22.52 R7.2 ; L7.2 25.22,23.76 R17.2 ; L7.2 25.15,23.89 v2(25.15,24.74)
  BOTTOM w0.5: 18.29,23.22 5.03,23.22 v2(3.94,24.31) 2.25,26 J3.13 ; 18.29,23.22 v2(18.29,22.53) ; 18.29,23.22 24.33,23.22 25.15,24.03 v2(25.15,24.74)
VDD_PA_ADJ: length 4.2
  TOP w0.5: R11.2 17.16,24.3 C67.2 R14.2 14.69,24.17 U9.5
ANT_SW_L1: length 25
  TOP w0.2: U1.26 v1(7.19,6.4)
  TOP w0.3: R16.1 v1(29.49,4.01)
  BOTTOM w0.2: v1(7.19,6.4) 7.19,6.48 7.44,6.73 12.65,6.73 13.18,6.2 18.03,6.2 19.15,5.08 26.9,5.08 27.97,4.01 v1(29.49,4.01)
GPIO00_L1: length 14.9
  TOP w0.18: U1.10 7.59,13.09 7.09,13.59 6.2,13.59 5.59,14.2 v1(5.08,14.2)
  BOTTOM w0.2: J3.11 1.63,22 3.1,20.52 3.1,14.94 3.84,14.2 v1(5.08,14.2)
GPIO01_L1: length 14.8
  TOP w0.2: v1(7.82,13.49) 7.99,13.32 U1.9
  TOP w0.3: R36.1 v1(7.07,20.76)
  BOTTOM w0.2: v1(7.82,13.49) 7.82,13.99 7.94,14.11 7.94,14.9 7.21,15.62 4.5,15.62 3.94,16.18 3.94,20.04 4.66,20.76 v1(7.07,20.76)
GPIO02_L1: length 10.4
  TOP w0.18: U1.12 5.69,12.73 5.28,13.13 v1(5.08,13.13)
  BOTTOM w0.2: v1(5.08,13.13) 3.48,13.13 2.03,14.58 2.03,16.97 1.01,18 J3.9
GPIO03_L1: length 12.8
  TOP w0.18: v1(5.46,13.64) 5.87,13.23 6.96,13.23 7.19,13 U1.11
  BOTTOM w0.2: v1(5.46,13.64) 3.68,13.64 2.54,14.78 2.54,19.02 1.57,20 J3.10
GPIO06_L1: length 8.4
  TOP w0.2: U1.13 5.68,12.03 v1(5.21,12.49)
  BOTTOM w0.2: J3.8 1.01,16 1.01,16 1.57,15.44 1.57,14.35 3.43,12.49 v1(5.21,12.49)
GPIO07_L1: length 7.1
  TOP w0.2: v1(5.12,11.89) 5.2,11.89 5.21,11.89 5.23,11.89 5.49,11.63 U1.14
  BOTTOM w0.2: J3.7 1.19,14 3.3,11.89 v1(5.12,11.89)
GPIO09_L1: length 17.7
  TOP w0.2: v1(12.57,7.57) 12.57,7.58 12.53,7.62 11.9,7.62 U1.37
  TOP w0.3: R9.1 27.96,4.91 27.91,4.95 v1(27.84,4.95)
  BOTTOM w0.2: v1(27.84,4.95) 27.33,5.47 19.45,5.47 18.31,6.6 13.53,6.6 v1(12.57,7.57)
GPIO16_L1: length 7.3
  TOP w0.2: v1(5.34,10.71) 5.4,10.77 5.47,10.83 U1.16
  BOTTOM w0.2: v1(5.34,10.71) 4.84,10.71 4.67,10.54 1.65,10.54 1.22,10.97 1.22,11.78 1.01,12 J3.6
GPIO17_L1: length 6.3
  TOP w0.2: v1(5.12,10.14) 5.13,10.14 5.15,10.16 5.43,10.16 5.71,10.43 U1.17
  BOTTOM w0.2: v1(5.12,10.14) 1.15,10.14 1.01,10 J3.5
GPIO44_L1: length 17.4
  TOP w0.2: U1.41 12.54,9.23 v1(12.62,9.14)
  TOP w0.3: R32.1 25.25,12.6 25.58,12.27 v1(25.58,11.95)
  BOTTOM w0.2: v1(12.62,9.14) 25.22,9.14 25.58,9.5 25.58,10.22 25.58,10.22 v1(25.58,11.95)
GPIO47_L1: length 21
  TOP w0.2: v1(13.08,7.9) 12.95,8.03 U1.38
  TOP w0.3: R10.2 28.05,9.26 v1(28.42,8.89)
  BOTTOM w0.2: v1(28.42,8.89) 28.42,6.35 27.91,5.84 19.81,5.84 18.69,6.96 14.02,6.96 v1(13.08,7.9)
GPIO60_L1: length 7.3
  TOP w0.2: v1(6.29,6.58) 6.59,6.58 6.79,6.78 U1.25
  BOTTOM w0.2: J3.3 1.12,6 1.71,6.58 v1(6.29,6.58)
GPIO62_L1: length 6.6
  TOP w0.2: U1.24 5.95,7.63 v1(5.57,7.24)
  BOTTOM w0.2: J3.4 1.01,8 1.76,7.24 v1(5.57,7.24)
LDO_3V3: length 25.4
  TOP w0.25: 16.15,6.7 U8.4
  TOP w0.4: 16.15,6.7 16.15,7.61 C64.2 ; R1.1 14.96,7.63 C64.2 ; C64.2 D6.1 v2(18.24,7.63) 18.24,7.62 R2.1
  VCC w0.45: J3.20 11,1.36 11,1.37 ; 11,1.37 9.4,1.37 9,0.98 J3.21 ; 11,1.37 18.02,1.37 arc(19.22,1.87) 19.71,3.06 19.71,6.86 arc(19.49,7.4) 18.95,7.62 18.93,7.62 18.92,7.63 v2(18.24,7.63)
PWR_TCXO_L1: length 2.5
  TOP w0.2: U1.6 9.19,13.26 9.47,13.54 9.47,14.1 8.89,14.68 R5.2
RF_TR: length 8.7
  TOP w0.5: U10.3 34.63,14.02 arc(33.52,13.56) 33.06,12.45 C49.2 33.06,10.59 ; 33.06,10.59 33,10.66 D1.2 ; 33.06,10.59 L16.1
RFI_N_L1: length 3
  TOP w0.22: U1.47 12.64,11.63 arc(12.8,11.66) 12.93,11.75 12.96,11.78 arc(13.1,11.87) 13.26,11.91 L11.2
  TOP w0.5: L11.2 14.78,11.91 C38.1
RFI_P_L1: length 3
  TOP w0.22: U1.46 12.67,11.23 arc(12.79,11.21) 12.89,11.14 12.92,11.11 arc(13.01,11.05) 13.13,11.02 13.66,11.02 L11.1
  TOP w0.5: C36.1 14.78,11.06 L11.1
RFO_L1: length 2.6
  TOP w0.25: U1.48 12.07,12.03 arc(12.2,12.05) 12.3,12.12 12.39,12.21 arc(12.49,12.36) 12.52,12.54 12.52,12.64 arc(12.55,12.77) 12.62,12.87 12.75,13 L1.1
  TOP w0.4: L1.1 13.46,13.72 L3.1
RSTN_L1: length 13.6
  TOP w0.2: v1(6.07,5.89) 7.67,5.89 7.99,6.21 U1.28
  TOP w0.3: R3.1 C50.1 5.59,5.46 6.02,5.89 v1(6.07,5.89)
  BOTTOM w0.25: v1(6.07,5.89) 3.86,5.89 3,5.03 3,2.95 2.05,2 J3.1
VR_PA_L1: length 3.6
  TOP w0.25: U1.1 11.19,12.95 arc(11.21,13.06) 11.28,13.16 11.32,13.2 arc(11.41,13.26) 11.53,13.28 11.64,13.28 arc(11.81,13.32) 11.95,13.41 L1.2
  TOP w0.4: C2.2 C1.2 12.47,13.93 L1.2 12.15,13.62
VREG_L1: length 16.8
  TOP w0.2: U1.23 5.55,8.03 v1(5.46,7.94) 5.08,7.56 L2.2 4.49,7.11 C12.1 ; v1(5.44,14.83) 5.49,14.83 5.66,14.66 C7.1 6.1,14.33 6.45,13.97 8.03,13.97 8.39,13.6 U1.8
  BOTTOM w0.2: v1(5.46,7.94) 6.21,7.94 6.58,8.31 6.58,14.45 6.2,14.83 v1(5.44,14.83)
XO32K_IN_L1: length 3.8
  TOP w0.2: U1.29 8.39,5.85 7.99,5.45 U2.1 7.49,5.25 C13.1
XO32K_OUT_L1: length 3.9
  TOP w0.2: U1.30 8.79,5.89 9.29,5.4 U2.2 9.79,5.25 C14.2
XTA_L1: length 2.2
  TOP w0.2: U1.4 9.99,14.65 R6.2
N16777695: length 2.2
  TOP w0.2: L2.1 5.12,9.16 5.44,8.83 U1.21
N16783930: length 3.2
  TOP w0.5: C38.2 16.98,11.91 C37.2 17.88,11.93 D5.1 19,11.91 C41.2
N16784957: length 4.6
  TOP w0.3: 23.28,11.62 23.46,11.44 U13.7
  TOP w0.5: L12.2 21.64,11.93 ; 21.64,11.93 22.97,11.93 23.28,11.62 ; 21.64,11.93 21.63,11.91 C41.1
N16787701: length 4.4
  TOP w0.2: R5.1 8.89,16.26 8.46,16.69 8.46,18.08 8.19,18.35 U3.4 7.73,18.35 C57.2
N17165846: length 3.1
  TOP w0.3: R13.2 8.09,21.48 R36.2
  TOP w0.5: R13.2 8.81,22.43 8.98,22.27 U9.3
N17167587: length 2.6
  TOP w0.5: R14.1 14.82,22.28 R15.2 14.82,22.27 U9.4
N17184405: length 1.8
  TOP w0.5: L14.2 20.83,24.12 R7.1
N17184423: length 8
  TOP w0.3: U4.8 25.11,20.51 25.27,20.35 25.27,20.01 U4.7
  TOP w0.5: L8.1 27,20.01 C27.1 ; 25.27,20.01 25.28,20.01 C27.1 ; C27.1 25.98,20.7 26.95,21.67 R17.1 25.22,22.16 L7.1
N17184595: length 5.1
  TOP w0.3: U4.2 22.04,20.01
  TOP w0.5: L14.1 20.95,21.51 21.44,21.03 C22.1 ; L6.2 21.42,20.02 C22.1 ; C22.1 21.46,20.01 22.04,20.01
N17196037: length 3.3
  TOP w0.3: R16.2 29.49,6.54 29.5,6.55 29.5,7.2 U7.4 ; R16.2 R9.2 ; R16.2 C45.2
N17196046: length 2.5
  TOP w0.3: C46.1 R10.1 29.05,8.59 29.25,8.4 U7.6
N17196048: length 2.6
  TOP w0.4: U7.5 30.25,7.8
  TOP w0.5: 30.25,7.8 C47.1
N17196103: length 1.9
  TOP w0.5: C47.2 C48.2 33.07,8.75 L16.2
N17196171: length 2.3
  TOP w0.3: 23.46,7.66 U13.2
  TOP w0.5: C54.1 23.93,7.19 23.46,7.66
N17198849: length 4.1
  TOP w0.5: C32.1 29.89,14.9 L17.1 29.94,14.85 C31.1 29.94,15.9 L15.2 29.88,16.9 C30.2
N17206614: length 1.9
  TOP w0.4: U7.1 26.96,8.4 26.95,8.41
  TOP w0.5: 26.95,8.41 26.75,8.61 C35.1
N17221635: length 1.3
  TOP w0.25: C66.1 14.12,6.24 U8.6
N17221684: length 1.4
  TOP w0.25: U8.1 15.15,4.48 14.97,4.3 14.97,3.68 R8.2
N17240361: length 2.1
  TOP w0.5: L8.2 28.95,20.02 C28.1 C29.2
N17246084: length 4.4
  TOP w0.5: C34.1 29.84,11.78 L18.1 C33.1 29.94,12.9 L17.2 29.84,13.9 C32.2
N17247102: length 2.3
  TOP w0.4: U7.3 27.24,7.2
  TOP w0.5: 27.24,7.2 26.34,7.2 26.33,7.19 C54.2
N17255377: length 3.4
  TOP w0.5: L18.2 29.84,10.78 C34.2 28,10.78 C51.1 27.22,10.84 C35.2
N17256212: length 2.2
  TOP w0.5: C29.1 L15.1 29.84,17.9 C30.1
N17258664: length 2.1
  TOP w0.5: 14.4,19.99 14.41,19.98 C19.2 15.5,19.99 C20.2
N17258678: length 3
  TOP w0.5: L3.2 L4.1 14.4,15.53 C15.1 14.5,14.59 C16.2
N17258699: length 3
  TOP w0.5: C17.1 14.5,17.29 C15.2 14.45,16.38 L4.2 L5.1
N17258757: length 1.1
  TOP w0.5: C18.1 13.61,19.2 L5.2
N17259603: length 2.1
  TOP w0.5: L6.1 19.63,20.01 C21.1 17.56,20.01 C20.1
N17299920: length 2.4
  TOP w0.3: U13.1 22.96,8.13 R33.2 R34.2
N17300837: length 2.9
  TOP w0.3: R31.2 R32.2 23.99,12.55 23.99,10.7 U13.6
N17308759: length 1.7
  TOP w0.2: R6.1 9.8,16.33 10.31,16.84 C58.2
N17309286: length 1.1
  TOP w0.2: U3.3 10.31,18.35 C58.1

## Copper pours and planes (outline as drawn; the poured copper is in the pictures)
GND on TOP (solid shape): 35.3,16.54 34.6,16.54 34.6,25.8 2.2,25.8 2.2,2.2 34.6,2.2 34.6,11.48 35.3,11.48 35.3,1.5 1.5,1.5 1.5,26.5 35.3,26.5
GND on TOP: 1,0 0.29,0.29 0,1 0,26.99 0.29,27.7 1,27.99 39.01,27.99 39.71,27.7 40,26.99 40,1 39.71,0.29 39.01,0 ; 1 cut-out
GND on BOTTOM: 1,0 0.29,0.29 0,1 0,26.99 0.29,27.7 1,27.99 39.01,27.99 39.71,27.7 40,26.99 40,1 39.71,0.29 39.01,0 ; 4 cut-outs
GND on GND: 1,0 0.29,0.29 0,1 0,26.99 0.29,27.7 1,27.99 39.01,27.99 39.71,27.7 40,26.99 40,1 39.71,0.29 39.01,0
GND on VCC: 1,0 0.29,0.29 0,1 0,26.99 0.29,27.7 1,27.99 39.01,27.99 39.71,27.7 40,26.99 40,1 39.71,0.29 39.01,0 ; 2 cut-outs
VCC_3V3 on VCC: 4.55,3.17 4.09,3.63 4.09,14.58 4.55,15.04 11.05,15.04 12.15,13.94 12.15,10.08 12.72,9.5 16.03,9.5 16.31,9.22 16.31,3.51 15.97,3.17

## Text on the board
Ref Des/Silkscreen Bottom: VER:11, 2024/03/08 | ASR6601CB_PA_LNA_MD
Ref Des/Silkscreen Top: 600M | 160M | 340M | 490M | 780M | 433M | 915M | 230M | 700M | 868M
User.36: FIGURE | SIZE | 0.2032 | 0.254 | 0.3048 | 0.5 | 1.0x0.25 | DRILL CHART: TOP to BOTTOM | ALL UNITS ARE IN MILLIMETERS | TOLERANCE | +0.0254/-0.0254 | +0.0/-0.0 | PLATED | QTY | 647 | 11 | 1 | 22 | 4 | 2
